# EAGLE board 8x8x8-RGB-LED-cube_bus (EAGLE 9.6.2)
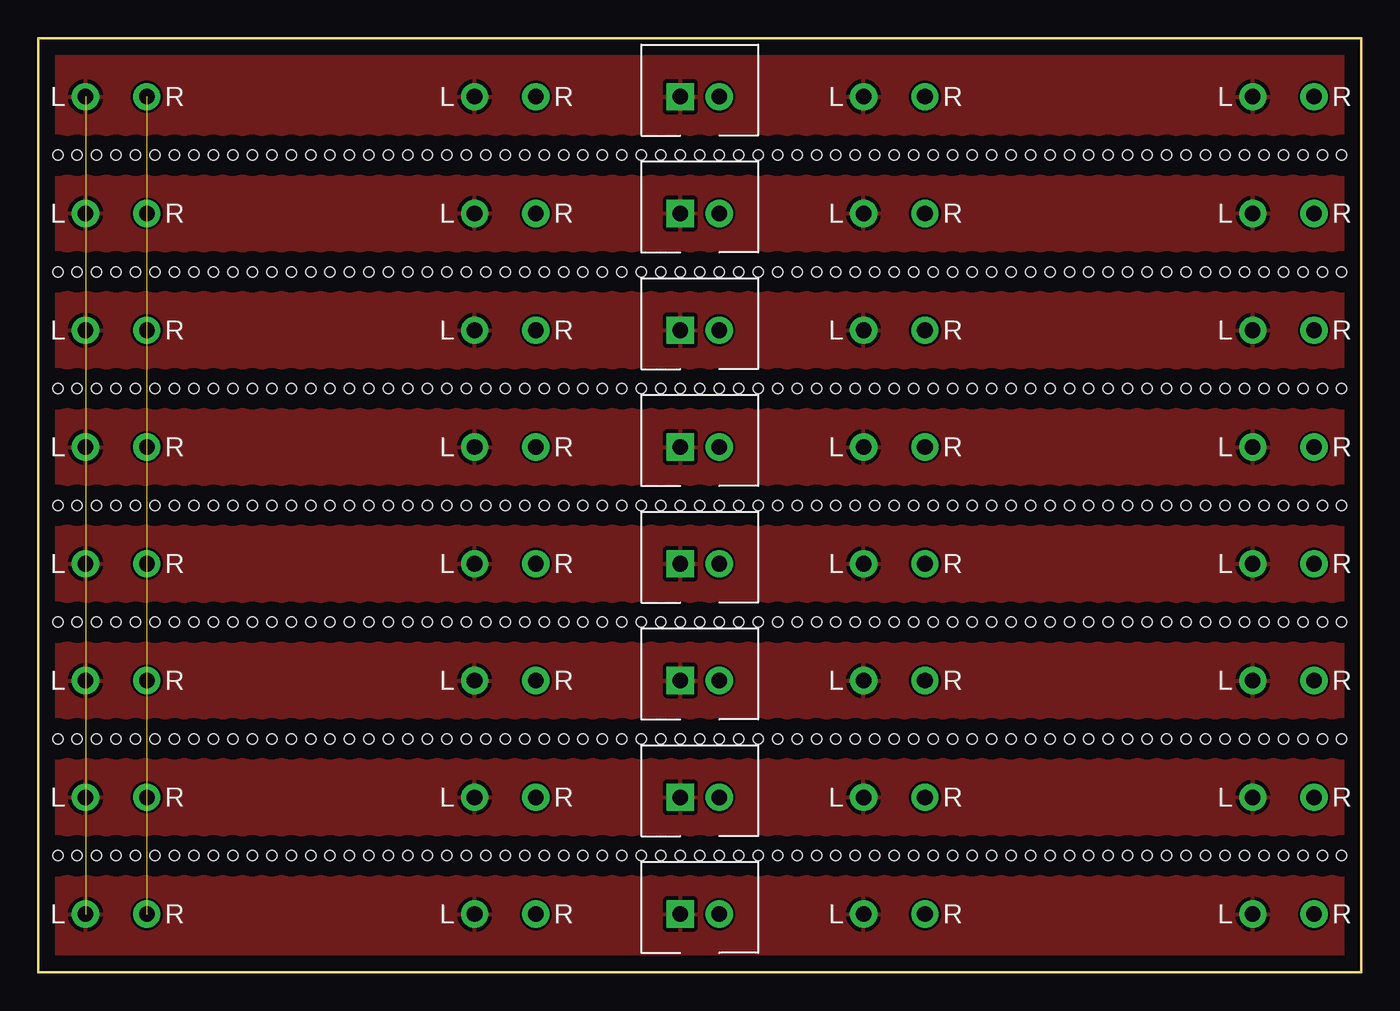
[diagram p0: board, top side]
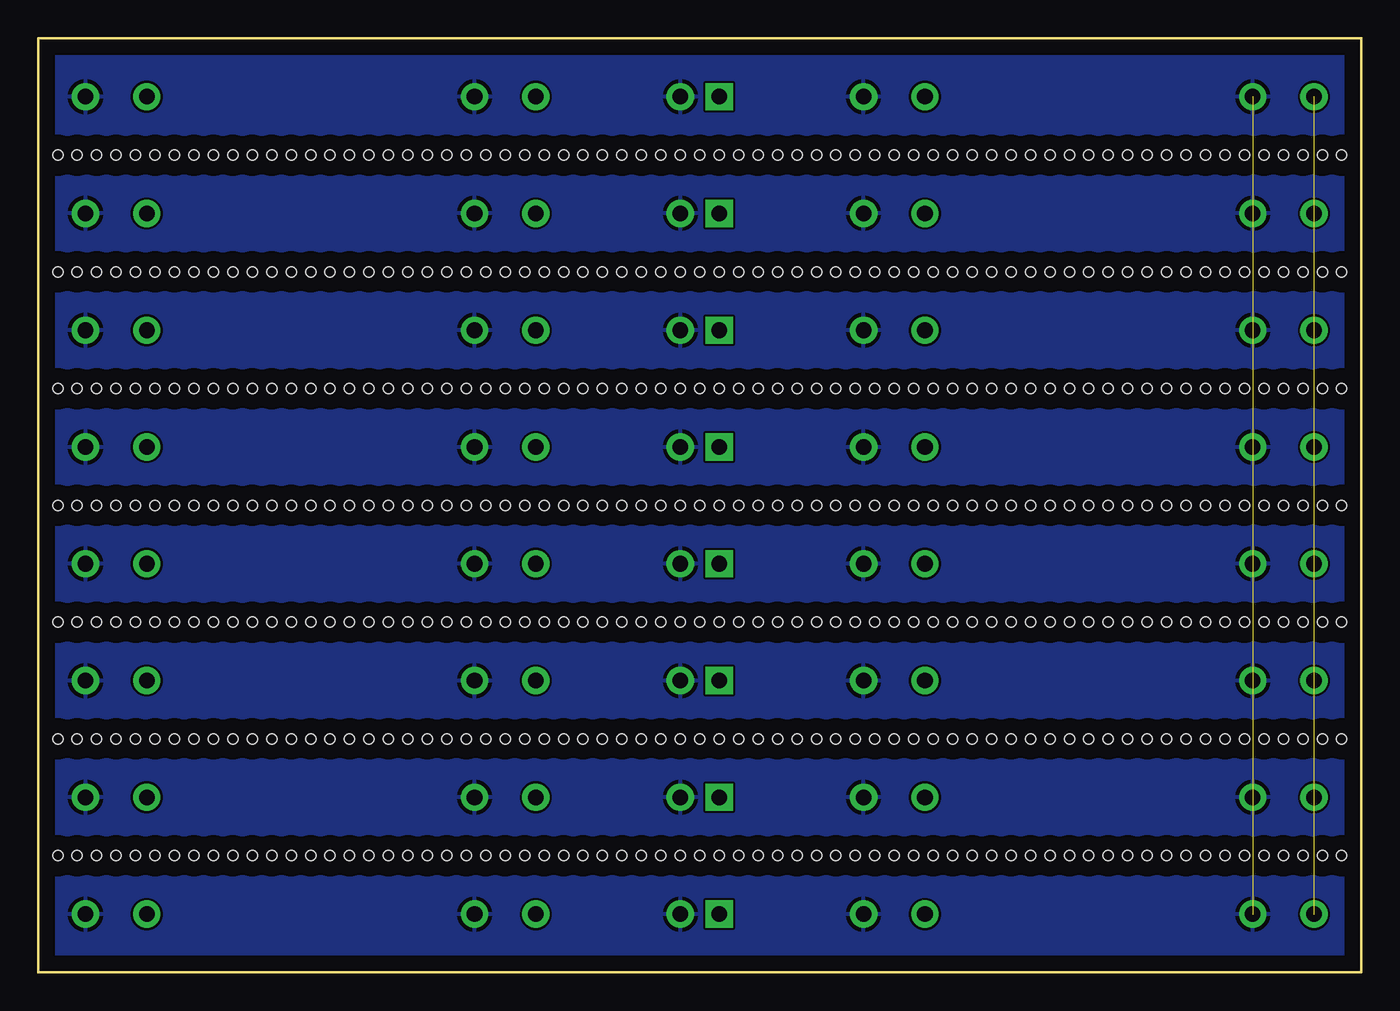
[diagram p1: board, bottom side, seen from below]

Size 86.36 x 60.96 mm. Coordinates in mm from the lower left corner, seen from the top.
Outline: 0,0 0,60.96 86.36,60.96 86.36,0 0,0
Copper layers (1*16): Top 0.035mm / dielectric 1.5mm / Bottom 0.035mm
Design rules "default": minimum track width 6mil, minimum drill 0.35mm, track to track 6mil, track to pad 6mil, pad to pad 6mil, via to via 6mil, smd to smd 6mil, copper to edge 40mil, drill to drill 6mil, minimum pad ring 10mil, minimum via ring 8mil, stop-mask expansion 4mil, vias tented up to drill 0mil, thermal gap 10mil
Holes 0.65 mm at 1.27,7.62 2.54,7.62 3.81,7.62 5.08,7.62 6.35,7.62 7.62,7.62 8.89,7.62 10.16,7.62 11.43,7.62 12.7,7.62 13.97,7.62 15.24,7.62 16.51,7.62 17.78,7.62 19.05,7.62 20.32,7.62 21.59,7.62 22.86,7.62 24.13,7.62 25.4,7.62 26.67,7.62 27.94,7.62 29.21,7.62 30.48,7.62 31.75,7.62 33.02,7.62 34.29,7.62 35.56,7.62 36.83,7.62 38.1,7.62 39.37,7.62 40.64,7.62 41.91,7.62 43.18,7.62 44.45,7.62 45.72,7.62 46.99,7.62 48.26,7.62 49.53,7.62 50.8,7.62 52.07,7.62 53.34,7.62 54.61,7.62 55.88,7.62 57.15,7.62 58.42,7.62 59.69,7.62 60.96,7.62 62.23,7.62 63.5,7.62 64.77,7.62 66.04,7.62 67.31,7.62 68.58,7.62 69.85,7.62 71.12,7.62 72.39,7.62 73.66,7.62 74.93,7.62 76.2,7.62 77.47,7.62 78.74,7.62 80.01,7.62 81.28,7.62 82.55,7.62 83.82,7.62 85.09,7.62 1.27,15.24 2.54,15.24 3.81,15.24 5.08,15.24 6.35,15.24 7.62,15.24 8.89,15.24 10.16,15.24 11.43,15.24 12.7,15.24 13.97,15.24 15.24,15.24 16.51,15.24 17.78,15.24 19.05,15.24 20.32,15.24 21.59,15.24 22.86,15.24 24.13,15.24 25.4,15.24 26.67,15.24 27.94,15.24 29.21,15.24 30.48,15.24 31.75,15.24 33.02,15.24 34.29,15.24 35.56,15.24 36.83,15.24 38.1,15.24 39.37,15.24 40.64,15.24 41.91,15.24 43.18,15.24 44.45,15.24 45.72,15.24 46.99,15.24 48.26,15.24 49.53,15.24 50.8,15.24 52.07,15.24 53.34,15.24 54.61,15.24 55.88,15.24 57.15,15.24 58.42,15.24 59.69,15.24 60.96,15.24 62.23,15.24 63.5,15.24 64.77,15.24 66.04,15.24 67.31,15.24 68.58,15.24 69.85,15.24 71.12,15.24 72.39,15.24 73.66,15.24 74.93,15.24 76.2,15.24 77.47,15.24 78.74,15.24 80.01,15.24 81.28,15.24 82.55,15.24 83.82,15.24 85.09,15.24 1.27,22.86 2.54,22.86 3.81,22.86 5.08,22.86 6.35,22.86 7.62,22.86 8.89,22.86 10.16,22.86 11.43,22.86 12.7,22.86 13.97,22.86 15.24,22.86 16.51,22.86 17.78,22.86 19.05,22.86 20.32,22.86 21.59,22.86 22.86,22.86 24.13,22.86 25.4,22.86 26.67,22.86 27.94,22.86 29.21,22.86 30.48,22.86 31.75,22.86 33.02,22.86 34.29,22.86 35.56,22.86 36.83,22.86 38.1,22.86 39.37,22.86 40.64,22.86 41.91,22.86 43.18,22.86 44.45,22.86 45.72,22.86 46.99,22.86 48.26,22.86 49.53,22.86 50.8,22.86 52.07,22.86 53.34,22.86 54.61,22.86 55.88,22.86 57.15,22.86 58.42,22.86 59.69,22.86 60.96,22.86 62.23,22.86 63.5,22.86 64.77,22.86 66.04,22.86 67.31,22.86 68.58,22.86 69.85,22.86 71.12,22.86 72.39,22.86 73.66,22.86 74.93,22.86 76.2,22.86 77.47,22.86 78.74,22.86 80.01,22.86 81.28,22.86 82.55,22.86 83.82,22.86 85.09,22.86 1.27,30.48 2.54,30.48 3.81,30.48 5.08,30.48 6.35,30.48 7.62,30.48 8.89,30.48 10.16,30.48 11.43,30.48 12.7,30.48 13.97,30.48 15.24,30.48 16.51,30.48 17.78,30.48 19.05,30.48 20.32,30.48 21.59,30.48 22.86,30.48 24.13,30.48 25.4,30.48 26.67,30.48 27.94,30.48 29.21,30.48 30.48,30.48 31.75,30.48 33.02,30.48 34.29,30.48 35.56,30.48 36.83,30.48 38.1,30.48 39.37,30.48 40.64,30.48 41.91,30.48 43.18,30.48 44.45,30.48 45.72,30.48 46.99,30.48 48.26,30.48 49.53,30.48 50.8,30.48 52.07,30.48 53.34,30.48 54.61,30.48 55.88,30.48 57.15,30.48 58.42,30.48 59.69,30.48 60.96,30.48 62.23,30.48 63.5,30.48 64.77,30.48 66.04,30.48 67.31,30.48 68.58,30.48 69.85,30.48 71.12,30.48 72.39,30.48 73.66,30.48 74.93,30.48 76.2,30.48 77.47,30.48 78.74,30.48 80.01,30.48 81.28,30.48 82.55,30.48 83.82,30.48 85.09,30.48 1.27,38.1 2.54,38.1 3.81,38.1 5.08,38.1 6.35,38.1 7.62,38.1 8.89,38.1 10.16,38.1 11.43,38.1 12.7,38.1 13.97,38.1 15.24,38.1 16.51,38.1 17.78,38.1 19.05,38.1 20.32,38.1 21.59,38.1 22.86,38.1 24.13,38.1 25.4,38.1 26.67,38.1 27.94,38.1 29.21,38.1 30.48,38.1 31.75,38.1 33.02,38.1 34.29,38.1 35.56,38.1 36.83,38.1 38.1,38.1 39.37,38.1 40.64,38.1 41.91,38.1 43.18,38.1 44.45,38.1 45.72,38.1 46.99,38.1 48.26,38.1 49.53,38.1 50.8,38.1 52.07,38.1 53.34,38.1 54.61,38.1 55.88,38.1 57.15,38.1 58.42,38.1 59.69,38.1 60.96,38.1 62.23,38.1 63.5,38.1 64.77,38.1 66.04,38.1 67.31,38.1 68.58,38.1 69.85,38.1 71.12,38.1 72.39,38.1 73.66,38.1 74.93,38.1 76.2,38.1 77.47,38.1 78.74,38.1 80.01,38.1 81.28,38.1 82.55,38.1 83.82,38.1 85.09,38.1 1.27,45.72 2.54,45.72 3.81,45.72 5.08,45.72 6.35,45.72 7.62,45.72 8.89,45.72 10.16,45.72 11.43,45.72 12.7,45.72 13.97,45.72 15.24,45.72 16.51,45.72 17.78,45.72 19.05,45.72 20.32,45.72 21.59,45.72 22.86,45.72 24.13,45.72 25.4,45.72 26.67,45.72 27.94,45.72 29.21,45.72 30.48,45.72 31.75,45.72 33.02,45.72 34.29,45.72 35.56,45.72 36.83,45.72 38.1,45.72 39.37,45.72 40.64,45.72 41.91,45.72 43.18,45.72 44.45,45.72 45.72,45.72 46.99,45.72 48.26,45.72 49.53,45.72 50.8,45.72 52.07,45.72 53.34,45.72 54.61,45.72 55.88,45.72 57.15,45.72 58.42,45.72 59.69,45.72 60.96,45.72 62.23,45.72 63.5,45.72 64.77,45.72 66.04,45.72 67.31,45.72 68.58,45.72 69.85,45.72 71.12,45.72 72.39,45.72 73.66,45.72 74.93,45.72 76.2,45.72 77.47,45.72 78.74,45.72 80.01,45.72 81.28,45.72 82.55,45.72 83.82,45.72 85.09,45.72 1.27,53.34 2.54,53.34 3.81,53.34 5.08,53.34 6.35,53.34 7.62,53.34 8.89,53.34 10.16,53.34 11.43,53.34 12.7,53.34 13.97,53.34 15.24,53.34 16.51,53.34 17.78,53.34 19.05,53.34 20.32,53.34 21.59,53.34 22.86,53.34 24.13,53.34 25.4,53.34 26.67,53.34 27.94,53.34 29.21,53.34 30.48,53.34 31.75,53.34 33.02,53.34 34.29,53.34 35.56,53.34 36.83,53.34 38.1,53.34 39.37,53.34 40.64,53.34 41.91,53.34 43.18,53.34 44.45,53.34 45.72,53.34 46.99,53.34 48.26,53.34 49.53,53.34 50.8,53.34 52.07,53.34 53.34,53.34 54.61,53.34 55.88,53.34 57.15,53.34 58.42,53.34 59.69,53.34 60.96,53.34 62.23,53.34 63.5,53.34 64.77,53.34 66.04,53.34 67.31,53.34 68.58,53.34 69.85,53.34 71.12,53.34 72.39,53.34 73.66,53.34 74.93,53.34 76.2,53.34 77.47,53.34 78.74,53.34 80.01,53.34 81.28,53.34 82.55,53.34 83.82,53.34 85.09,53.34

## Footprints (pad centres in the part's own frame; a part is rotated, then mirrored left to right if it is on the bottom)
RGB-CUBE-BUS = drill 1.016 pad 1.778: L -2,0; R 2,0
XH2.54_2-PIN = drill 1.016 pad 1.778 square: 1 -1.27,0 | drill 1.016 pad 1.778: 2 1.27,0

## Placement (x,y rotation side)
B1  [RGB-CUBE-BUS]  5.08,3.81 0 top
B2  [RGB-CUBE-BUS]  30.48,3.81 0 top
B3  [RGB-CUBE-BUS]  55.88,3.81 0 top
B4  [RGB-CUBE-BUS]  81.28,3.81 0 top
B5  [RGB-CUBE-BUS]  5.08,11.43 0 top
B6  [RGB-CUBE-BUS]  30.48,11.43 0 top
B7  [RGB-CUBE-BUS]  55.88,11.43 0 top
B8  [RGB-CUBE-BUS]  81.28,11.43 0 top
B9  [RGB-CUBE-BUS]  5.08,19.05 0 top
B10  [RGB-CUBE-BUS]  30.48,19.05 0 top
B11  [RGB-CUBE-BUS]  55.88,19.05 0 top
B12  [RGB-CUBE-BUS]  81.28,19.05 0 top
B13  [RGB-CUBE-BUS]  5.08,26.67 0 top
B14  [RGB-CUBE-BUS]  30.48,26.67 0 top
B15  [RGB-CUBE-BUS]  55.88,26.67 0 top
B16  [RGB-CUBE-BUS]  81.28,26.67 0 top
B17  [RGB-CUBE-BUS]  5.08,34.29 0 top
B18  [RGB-CUBE-BUS]  30.48,34.29 0 top
B19  [RGB-CUBE-BUS]  55.88,34.29 0 top
B20  [RGB-CUBE-BUS]  81.28,34.29 0 top
B21  [RGB-CUBE-BUS]  5.08,41.91 0 top
B22  [RGB-CUBE-BUS]  30.48,41.91 0 top
B23  [RGB-CUBE-BUS]  55.88,41.91 0 top
B24  [RGB-CUBE-BUS]  81.28,41.91 0 top
B25  [RGB-CUBE-BUS]  5.08,49.53 0 top
B26  [RGB-CUBE-BUS]  30.48,49.53 0 top
B27  [RGB-CUBE-BUS]  55.88,49.53 0 top
B28  [RGB-CUBE-BUS]  81.28,49.53 0 top
B29  [RGB-CUBE-BUS]  5.08,57.15 0 top
B30  [RGB-CUBE-BUS]  30.48,57.15 0 top
B31  [RGB-CUBE-BUS]  55.88,57.15 0 top
B32  [RGB-CUBE-BUS]  81.28,57.15 0 top
P1  [XH2.54_2-PIN]  43.18,3.81 0 top
P2  [XH2.54_2-PIN]  43.18,11.43 0 top
P3  [XH2.54_2-PIN]  43.18,19.05 0 top
P4  [XH2.54_2-PIN]  43.18,26.67 0 top
P5  [XH2.54_2-PIN]  43.18,34.29 0 top
P6  [XH2.54_2-PIN]  43.18,41.91 0 top
P7  [XH2.54_2-PIN]  43.18,49.53 0 top
P8  [XH2.54_2-PIN]  43.18,57.15 0 top

## Library data of the parts
B1-B32 P1-P8 = myLibrary

## Nets
L: B1.L B2.L B3.L B4.L B5.L B6.L B7.L B8.L B9.L B10.L B11.L B12.L B13.L B14.L B15.L B16.L B17.L B18.L B19.L B20.L B21.L B22.L B23.L B24.L B25.L B26.L B27.L B28.L B29.L B30.L B31.L B32.L P1.1 P2.1 P3.1 P4.1 P5.1 P6.1 P7.1 P8.1
R: B1.R B2.R B3.R B4.R B5.R B6.R B7.R B8.R B9.R B10.R B11.R B12.R B13.R B14.R B15.R B16.R B17.R B18.R B19.R B20.R B21.R B22.R B23.R B24.R B25.R B26.R B27.R B28.R B29.R B30.R B31.R B32.R P1.2 P2.2 P3.2 P4.2 P5.2 P6.2 P7.2 P8.2

## Tracks (layer width: path | path; a pad name or v marks a point on that pad's centre or on a via)
L  (7 unrouted)
  pour Top: -2.54,-2.54 88.9,-2.54 88.9,63.5 -2.54,63.5
R  (7 unrouted)
  pour Bottom: -1.27,-1.27 87.63,-1.27 87.63,62.23 -1.27,62.23